# Altium PCB Shield.PcbDoc
Units mil, origin at the board's own origin, x right, y up, seen from the top; angles counter-clockwise.
Board outline 1750 x 2100 mil, 2 copper layers (Top Layer, Bottom Layer); 4 components, 29 nets, 28 pads, 0 vias.
Unrouted connection lines stored in the file: 2.
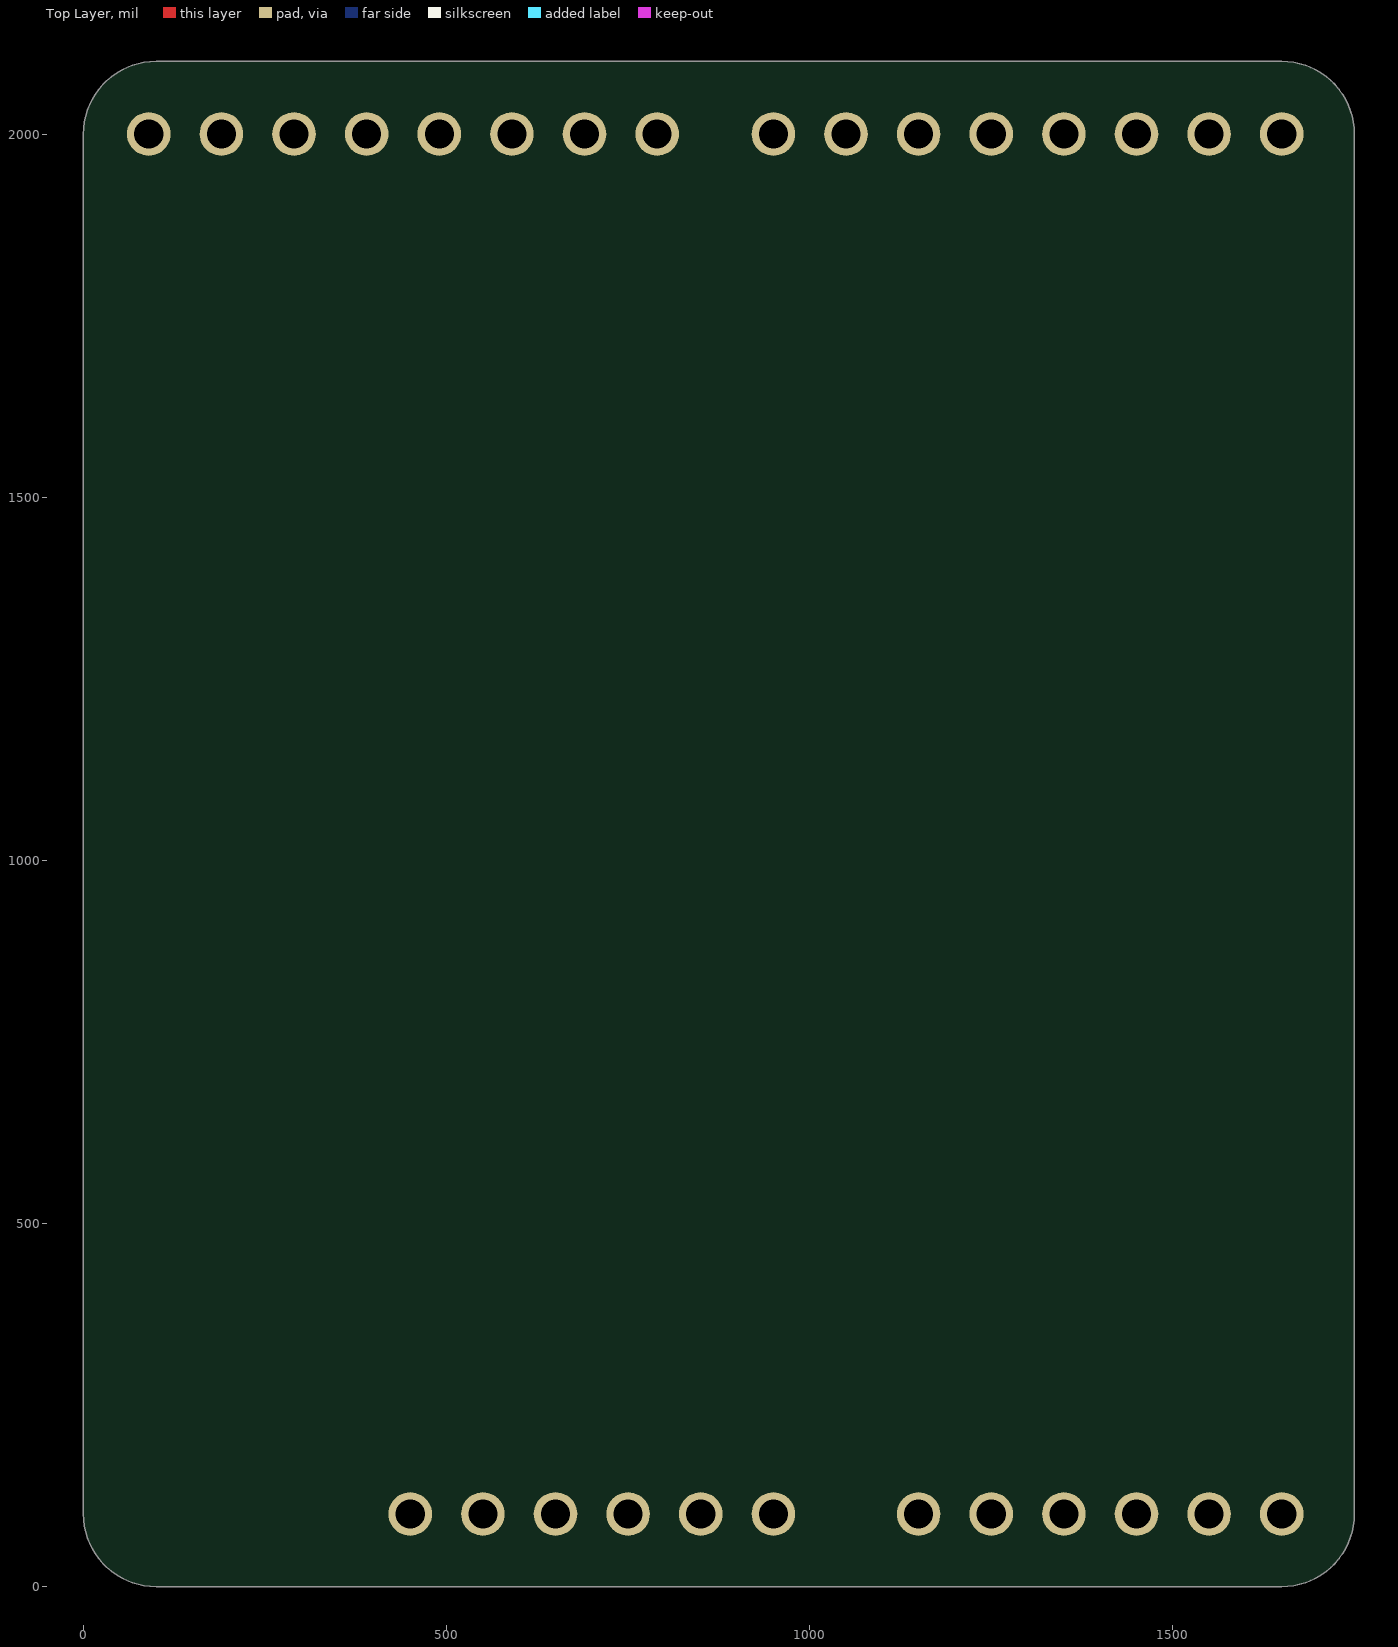
[diagram p0: Top Layer view]
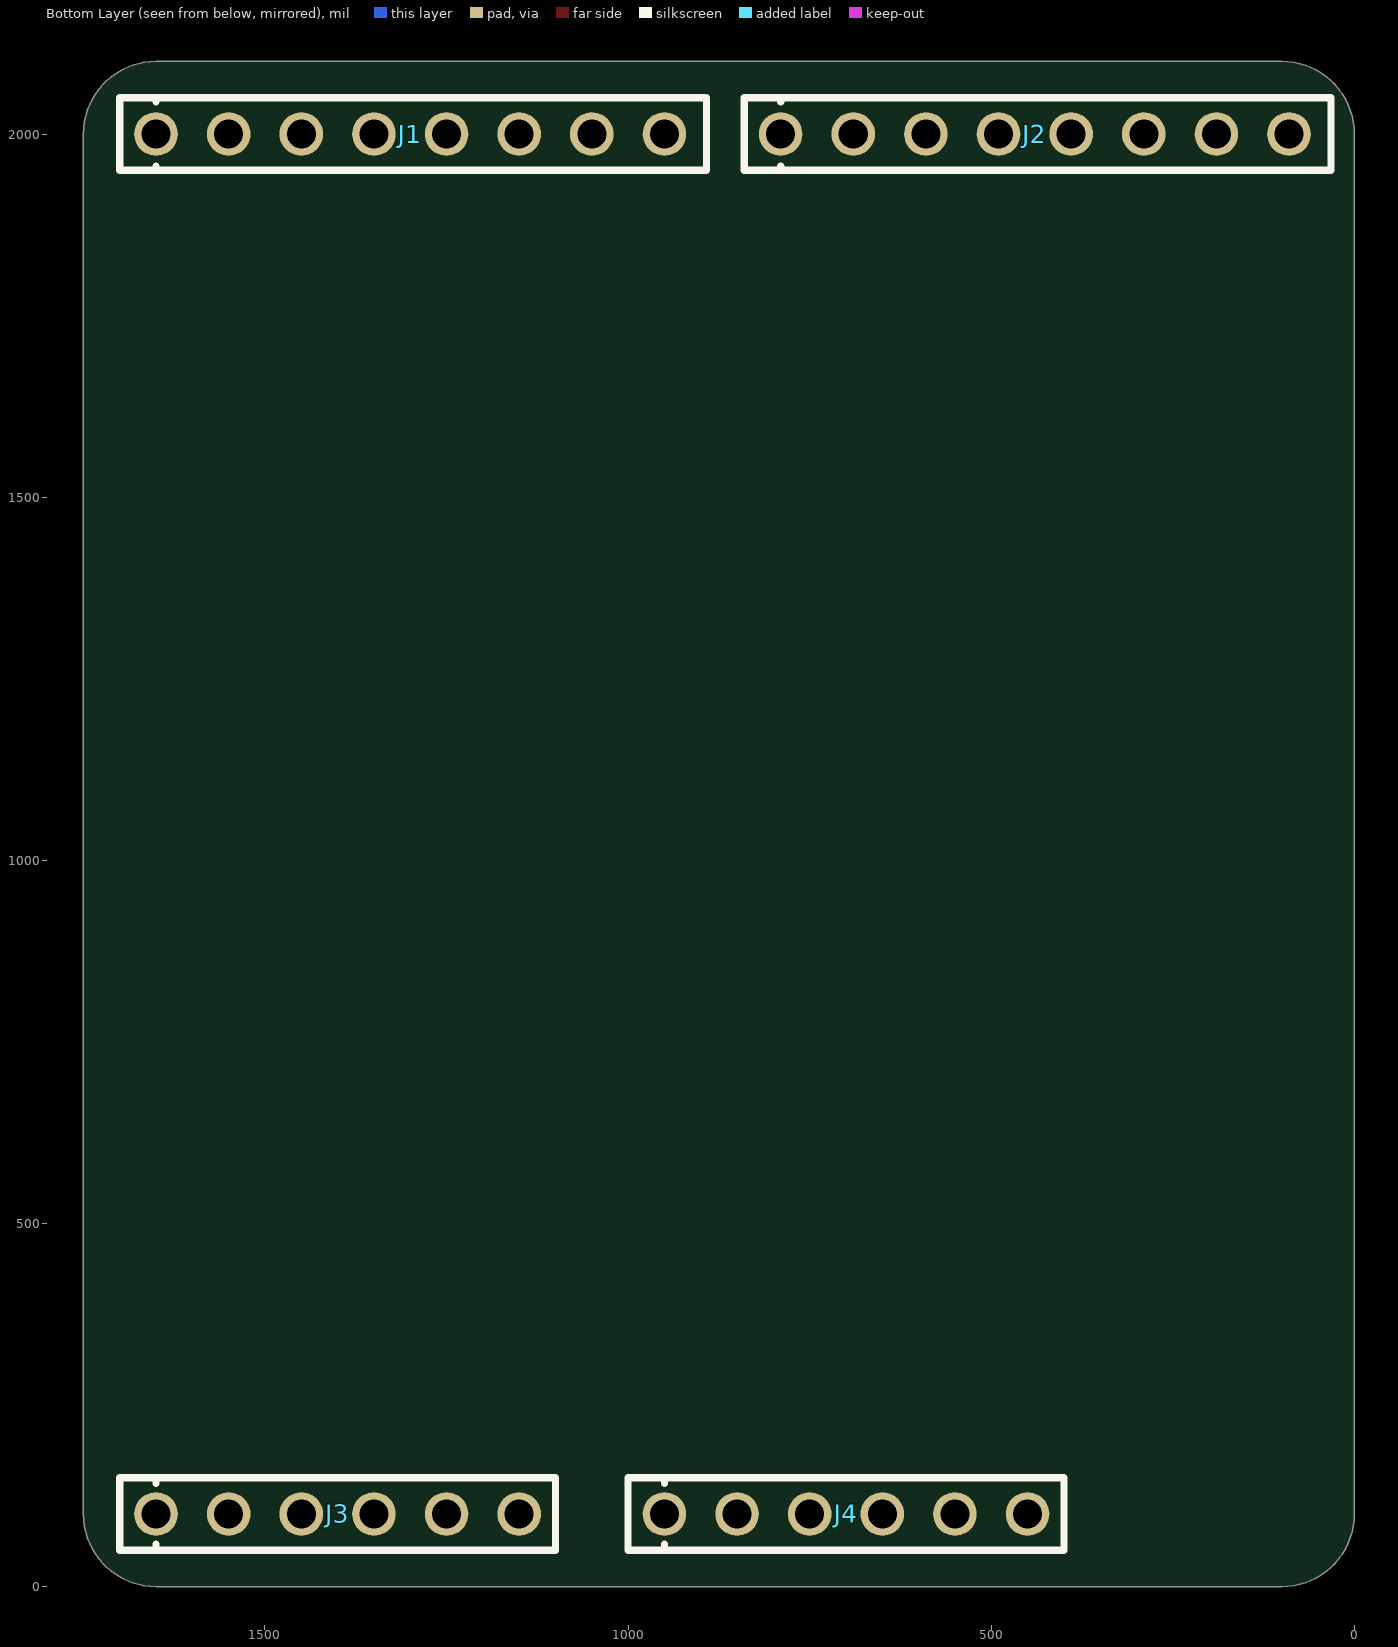
[diagram p1: Bottom Layer view, seen from below]

## Layer stack, top to bottom
Top Solder: solder mask 0.4, Solder Resist, Dk 3.5
Top Layer: signal copper 1.4
Dielectric1: dielectric 12.6, FR-4, Dk 4.8
Bottom Layer: signal copper 1.4
Bottom Solder: solder mask 0.4, Solder Resist, Dk 3.5

## Board outline
0,100 0,2000 cw(c100,2000) 100,2100 1650,2100 cw(c1650,2000) 1750,2000 1750,100 cw(c1650,100) 1650,0 100,0 cw(c100,100)

## Design rules (kind name [scope] priority, off if disabled: settings)
Clearance [All] p1: gap=6
MinimumSolderMaskSliver [All] p1: minsoldermaskwidth=3
PolygonConnect [All] p1: connectstyle=Relief reliefconductorwidth=10 reliefentries=4 polygonreliefangle="90 Angle" airgapwidth=10
RoutingVias [All] p1: holewidth=15 width=30 viastyle="Through Hole" minholewidth=15 minwidth=30 maxholewidth=28 maxwidth=50
SilkToSilkClearance [All] p1: silktosilkclearance=5
SilkToSolderMaskClearance SilkscreenOverComponentPads [IsPad] p1: minsilkscreentomaskgap=3 clearancetoexposedcopper=TRUE
SolderMaskExpansion [All] p1: expansion=4
Width [All] p1: maxlimit=50 minlimit=6 preferedwidth=6
27 further rules are at their usual default settings.

## Components (designator, comment, footprint, x,y, rotation, side; value= is the part's Value field where it differs from the comment)
J1 "J_HDR1X8_THRHOLE_VERT" HDR_1X8 1650,2000 r180 bottom locked
J2 "J_HDR1X8_THRHOLE_VERT" HDR_1X8 790,2000 r180 bottom locked
J3 "J_HDR1X6_THRHOLE_VERT" HDR_1X6 1650,100 r180 bottom locked
J4 "J_HDR1X6_THRHOLE_VERT" HDR_1X6 950,100 r180 bottom locked

## Footprints (in the part's own frame and the unit in brackets; to place one, negate y for a bottom-side part, rotate by r counter-clockwise, add the part's x,y. Pads: shape width x height; smd on the part's side, far side on the other; paste and mask are expansions set on the pad)
HDR_1X6 [mil] "HEADER"
  round 60 hole 40: 1(0,0) 2(100,0) 3(200,0) 4(300,0) 5(400,0) 6(500,0)
  silkscreen extent -50,-50 550,50, body extent -50,-50 550,50, height 334
HDR_1X8 [mil] "HEADER"
  round 60 hole 40: 1(0,0) 2(100,0) 3(200,0) 4(300,0) 5(400,0) 6(500,0) 7(600,0) 8(700,0)
  silkscreen extent -50,-50 758,50, body extent -50,-48 746,50, height 329

## Part data
J1 J2 J3 J4: "CONN HEADER .100\" 12POS TIN PCB"

## Nets (pads, with @x,y where several pads share a name; then routed paths per layer and width w, separated by ;. In a path a pad name is that pad's centre, name@x,y a point inside that pad or via, vN(x,y) a via of type N, cw(c..) or ccw(c..) an arc to the next point about the centre after c; other vN are vias at no path point)
C\A\M\_\R\S\T\_\V\2\P\8\: 
CAM_CLK_IN: J2.2
CAM_CLK_IN_V2P8: 
CAM_D0: J1.2
CAM_D1: J1.3
CAM_D2: J1.4
CAM_D3: J1.5
CAM_D4: J1.6
CAM_D5: J1.7
CAM_D6: J1.8
CAM_D7: J2.1
CAM_HSYNC: J3.4
CAM_PIXCLK: J1.1
CAM_RST: J2.3
CAM_VSYNC: J3.5
CAMERA_FLASH: J3.6
CAMERA_LED: J2.6
GND: J2.7 J4.2 J4.3
I2C_SCL: J2.4
I2C_SDA: J2.5
NetC1_1: 
NetC4_1: 
NetJ6_3: 
NetLED1_2: 
NetLED2_1: 
V1P5: 
V2P8: 
V3P3: 
V3P3_DIONYSUS: J2.8
pads on no net: J3.1 J3.2 J3.3 J4.1 J4.4 J4.5 J4.6

## Silkscreen, mask and mechanical layers (free items; w line width, h text height)
Mechanical 2:
  the board outline again, w6